# EAGLE board ENGI301-Project2 (EAGLE 9.6.2)
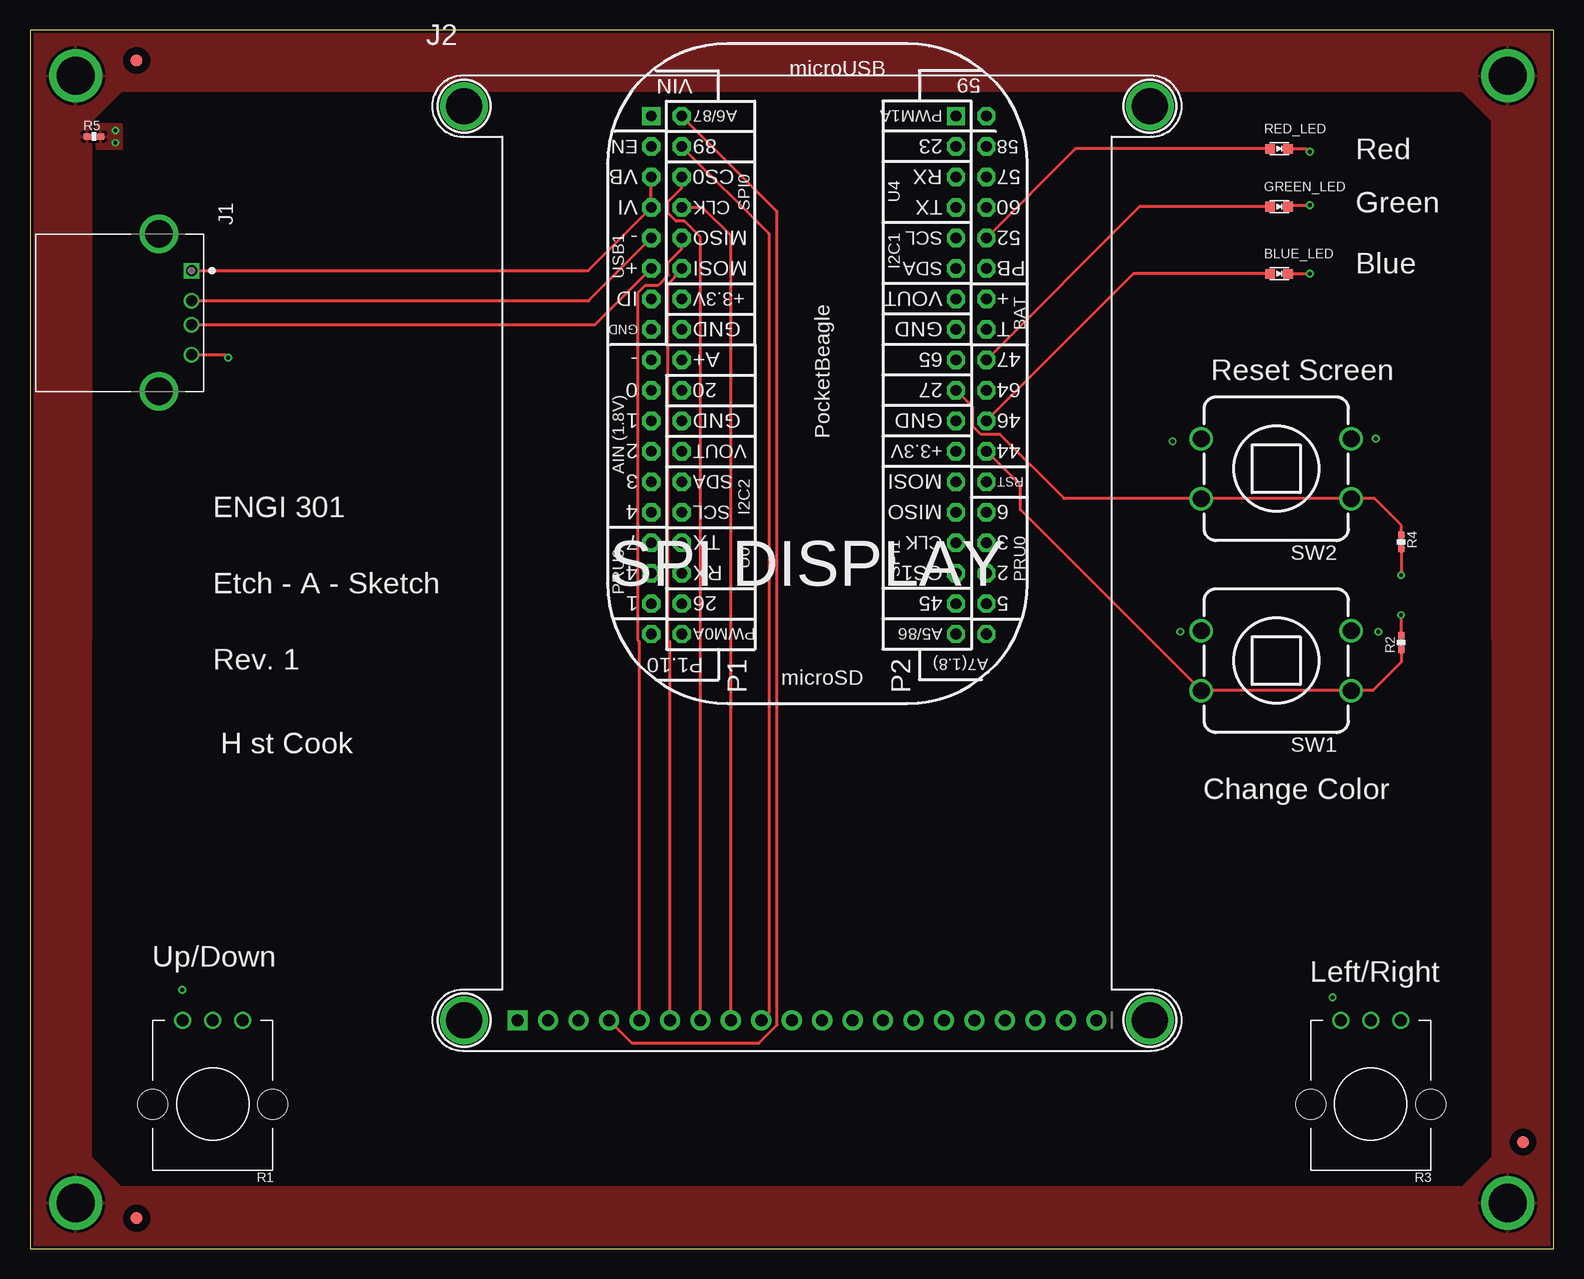
[diagram p0: board, top side]
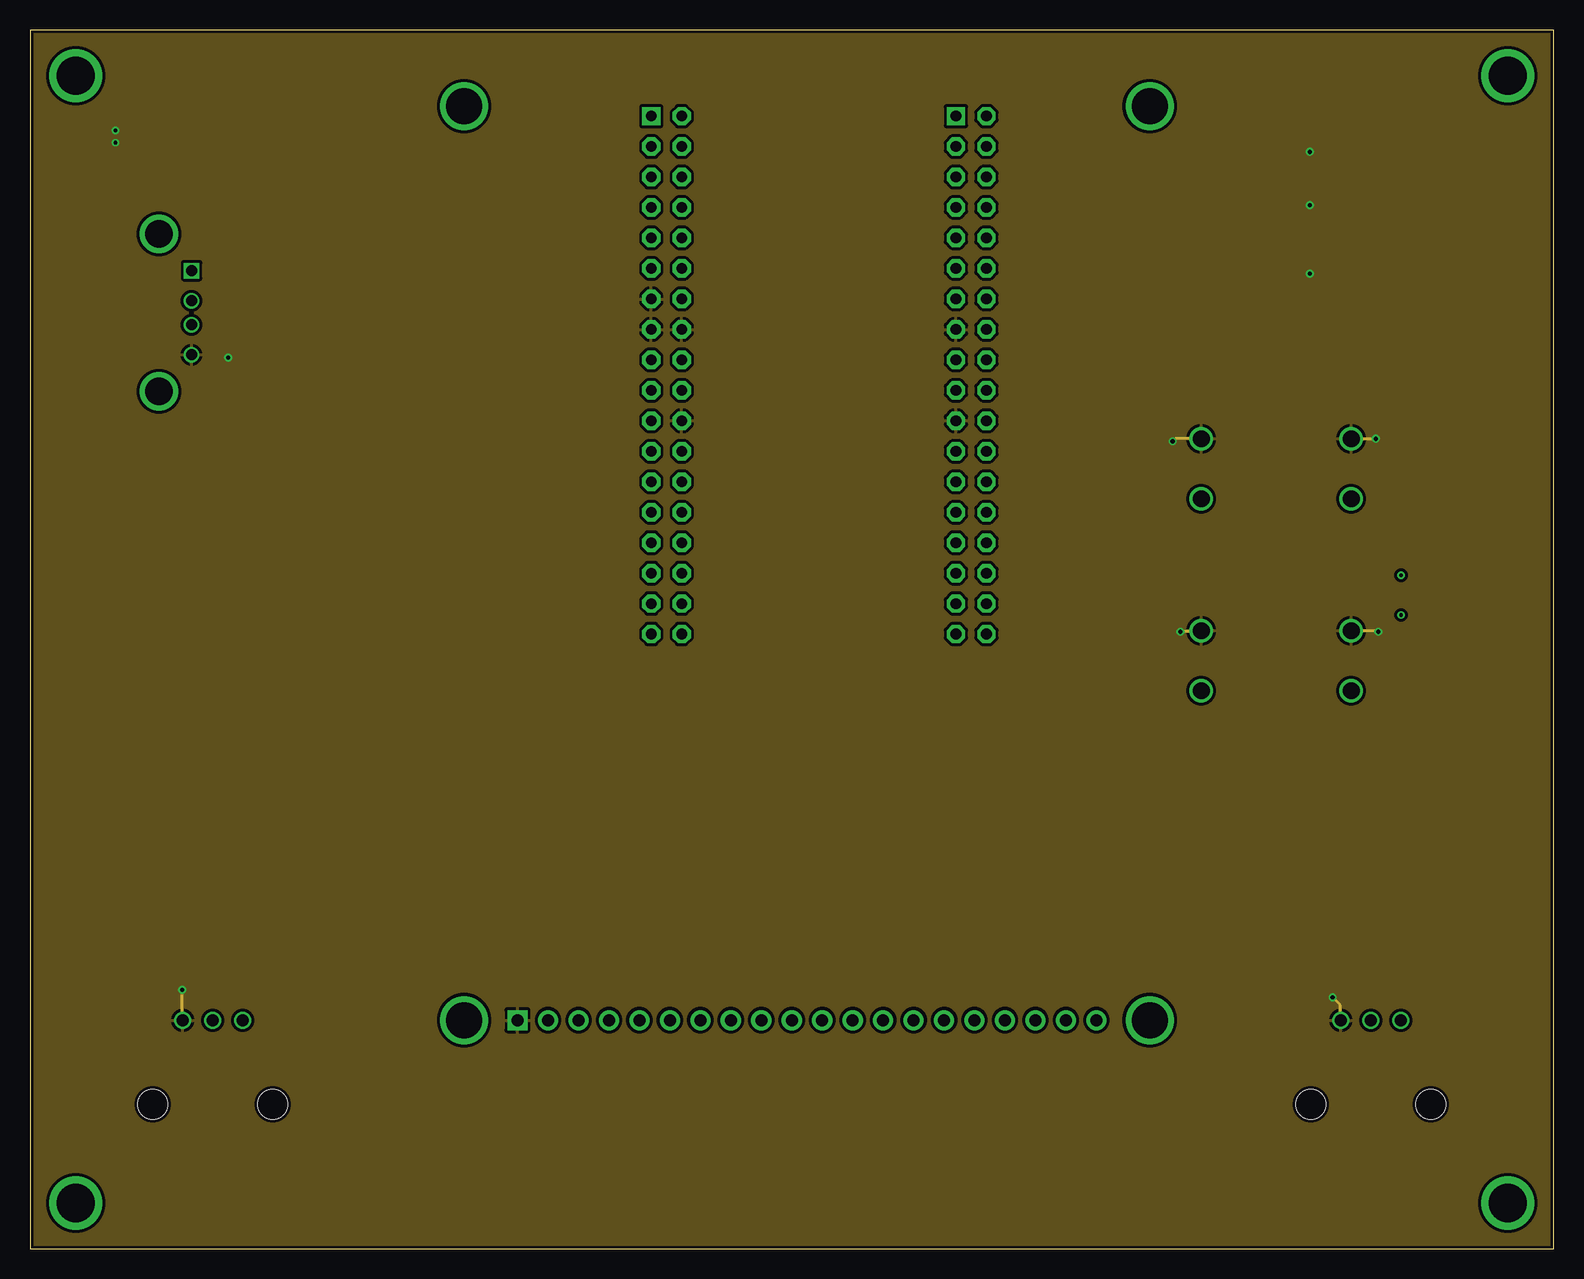
[diagram p1: board, inner layer Route2]
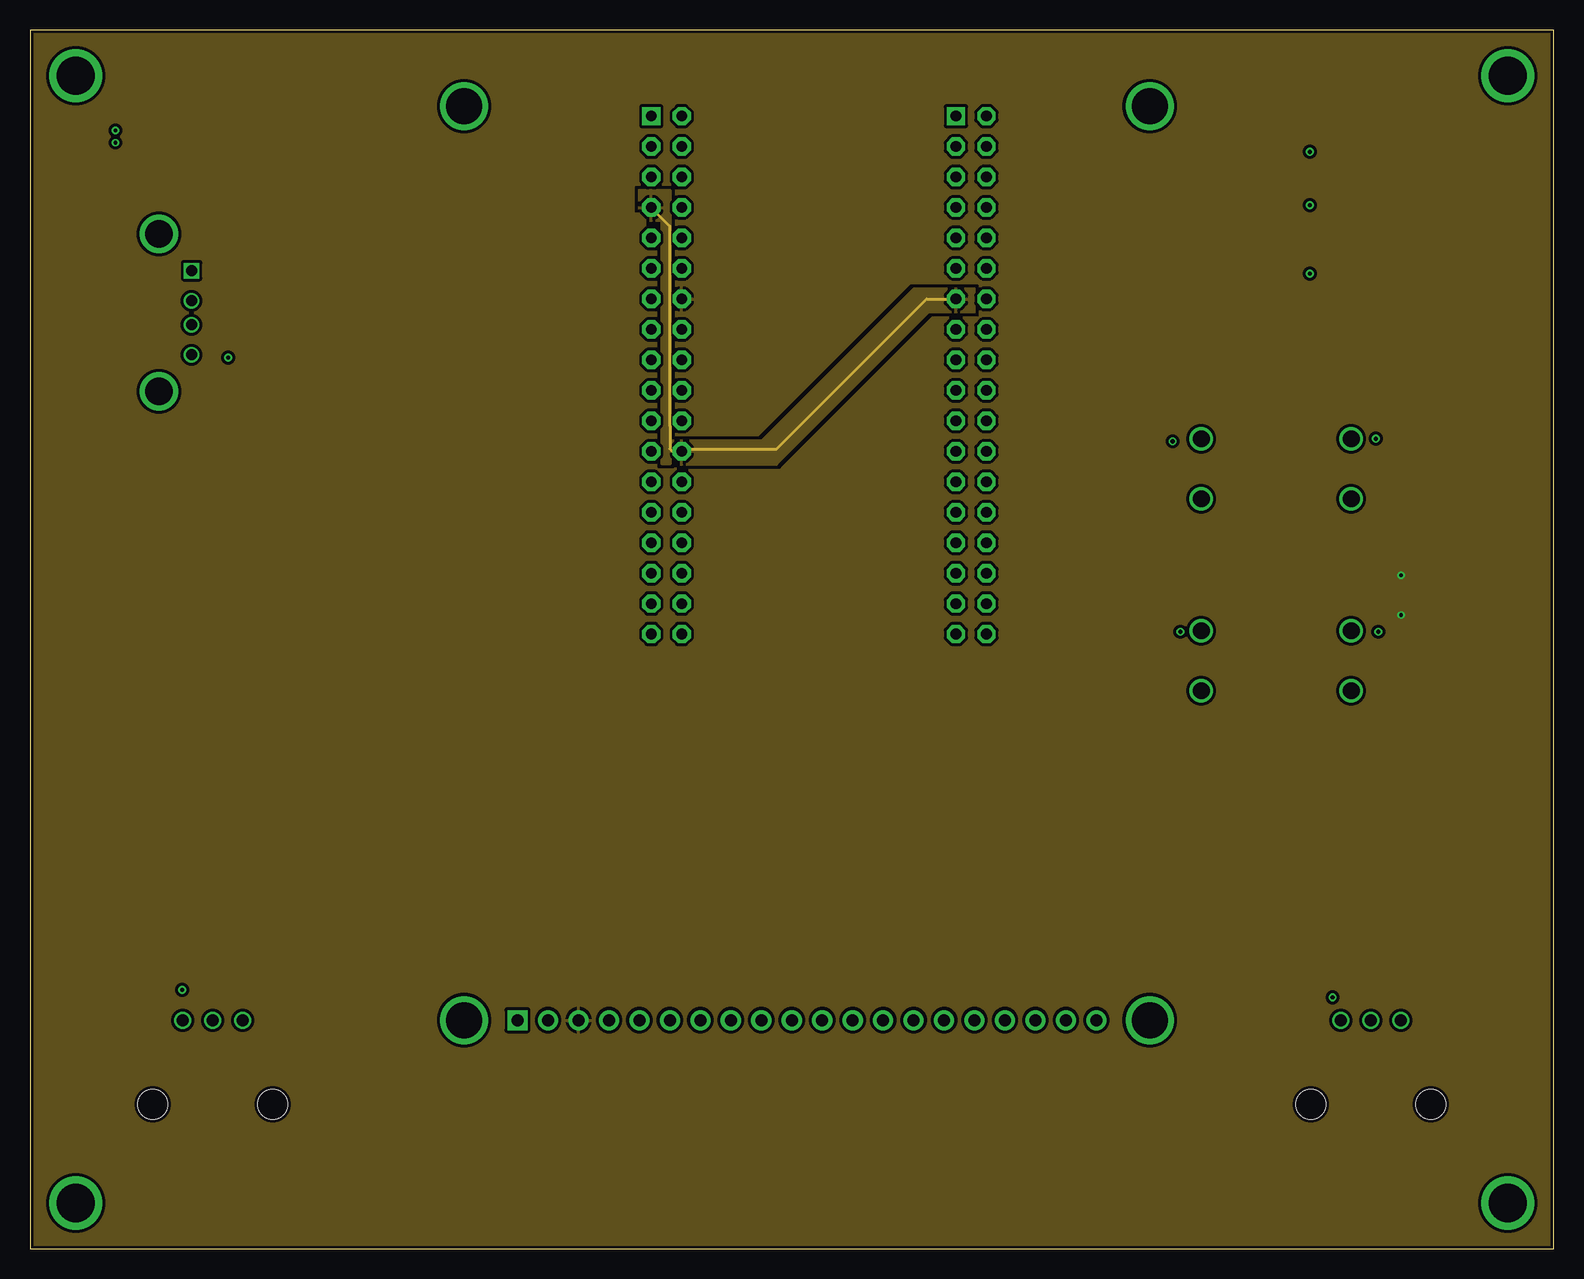
[diagram p2: board, inner layer Route15]
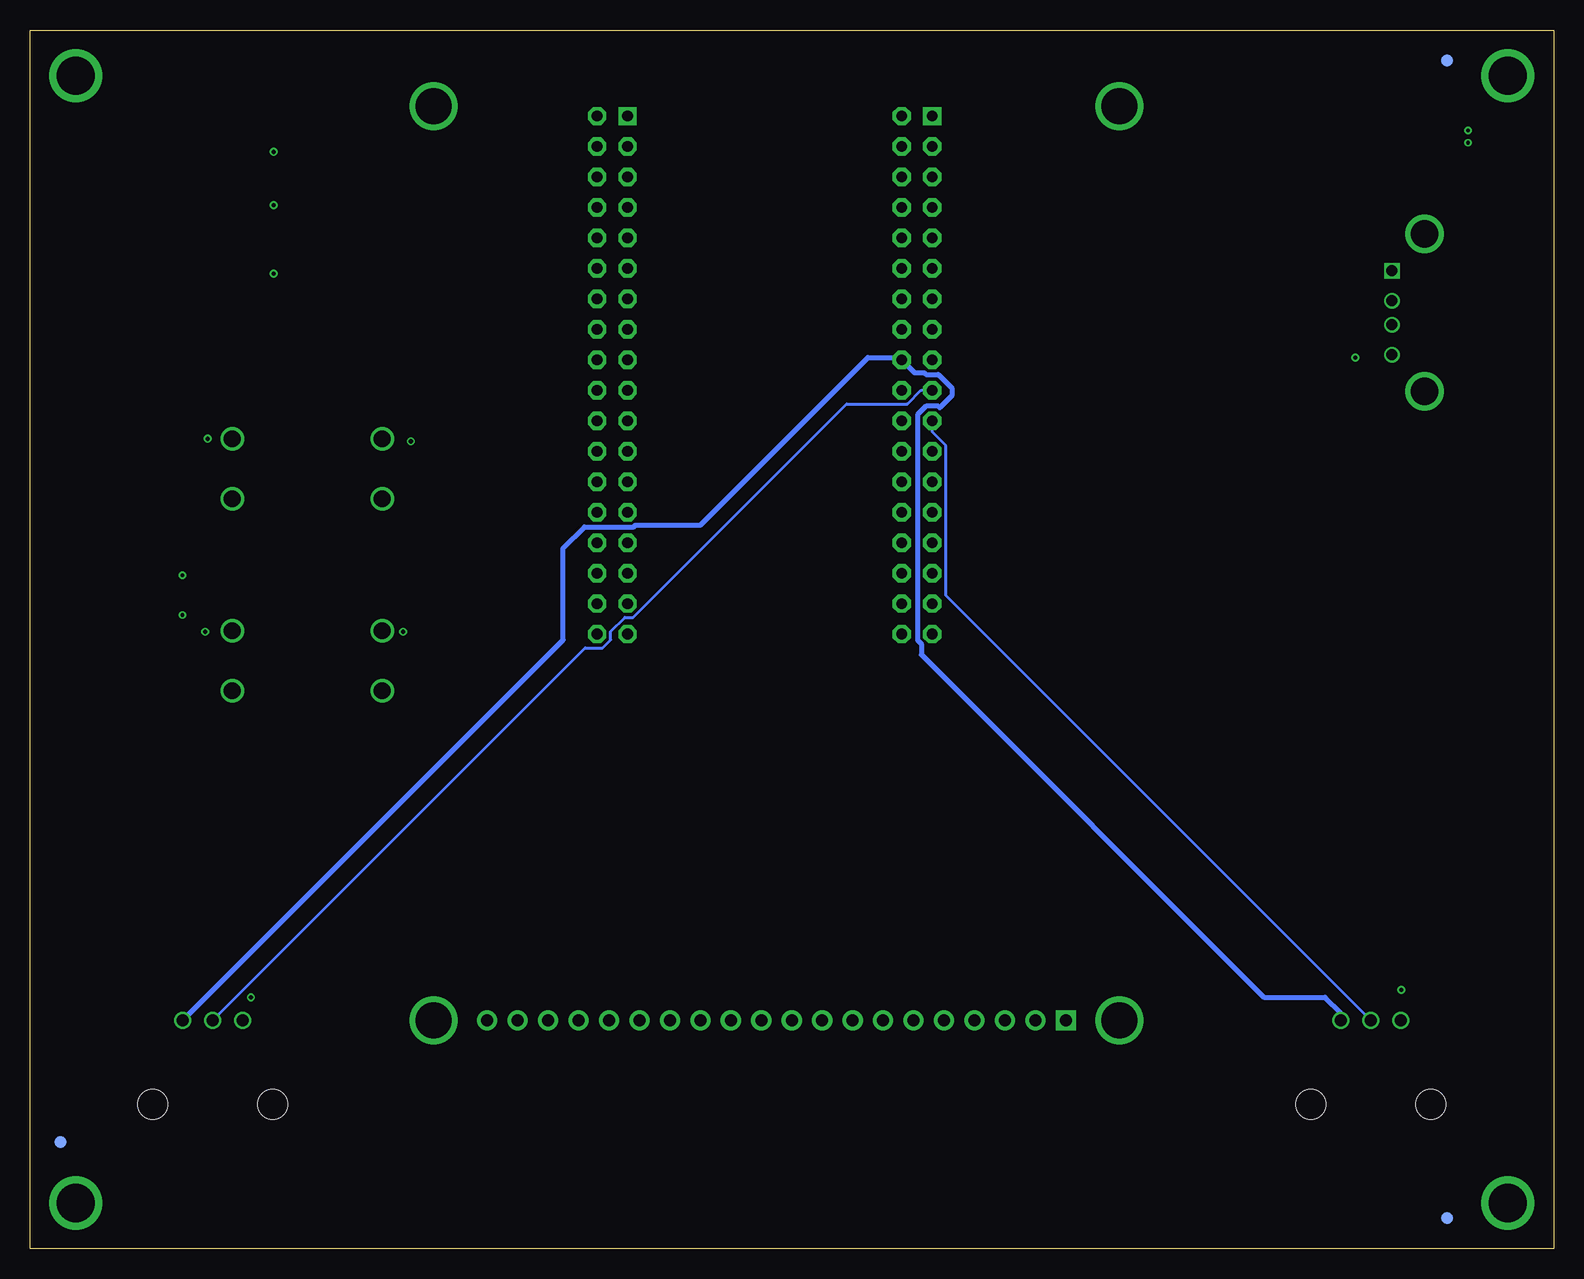
[diagram p3: board, bottom side, seen from below]

Size 127 x 101.6 mm. Coordinates in mm from the lower left corner, seen from the top.
Outline: 0,0 127,0 127,101.6 0,101.6 0,0
Copper layers (1*2*15*16): Top 0.035mm / dielectric 0.23mm / Route2 0.035mm / dielectric 0.93mm / Route15 0.035mm / dielectric 0.23mm / Bottom 0.035mm
Design rules "ENGI301_4lyr": minimum track width 10mil, minimum drill 12mil, track to track 10mil, track to pad 10mil, pad to pad 10mil, via to via 10mil, smd to smd 10mil, copper to edge 10mil, drill to drill 12mil, minimum pad ring 6mil, minimum via ring 6mil, stop-mask expansion 3mil, vias tented up to drill 25mil, thermal gap 10mil

## Footprints (pad centres in the part's own frame; a part is rotated, then mirrored left to right if it is on the bottom)
EIA-STD = smd 0.8 x 0.8: ANODE -0.75,0; CATHODE 0.75,0
FIDUCIAL_40MIL = smd 1.016 x 1.016: P$1 0,0
TE_292303-1 = drill 0.92 square: 1 0,0 | drill 0.92: 2 2.5,0; 3 4.5,0; 4 7,0 | drill 2.3: SH1 -3.07,-2.71; SH2 10.07,-2.71
SPI_LCD_DISPLAY = drill 1 pad 1.676 square: 1@JP2 -24.13,-38.1 | drill 1 pad 1.676: 2@JP2 -21.59,-38.1; 3@JP2 -19.05,-38.1; 4@JP2 -16.51,-38.1; 5@JP2 -13.97,-38.1; 6@JP2 -11.43,-38.1; 7@JP2 -8.89,-38.1; 8@JP2 -6.35,-38.1; 9@JP2 -3.81,-38.1; 10@JP2 -1.27,-38.1; 11@JP2 1.27,-38.1; 12@JP2 3.81,-38.1; 13@JP2 6.35,-38.1; 14@JP2 8.89,-38.1; 15@JP2 11.43,-38.1; 16@JP2 13.97,-38.1; 17@JP2 16.51,-38.1; 18@JP2 19.05,-38.1; 19@JP2 21.59,-38.1; 20@JP2 24.13,-38.1 | drill 3 pad 3.6: P$1@U$7 -28.575,-38.1; P$1@U$15 28.575,-38.1; P$1@U$16 -28.575,38.1; P$1@U$17 28.575,38.1
MOUNTING_HOLE = drill 3.175 pad 4.445: P$1 0,0
POT-PO90S = drill 1: CCW -2.5,0; CW 2.5,0; S 0,0 | hole 2.5: -5,7; 5,7
R0402 = smd 0.61 x 0.508: 1 -0.559,0; 2 0.559,0
BUTTON_12.5MM = drill 1.4: 1 -6.25,2.5; 2 -6.25,-2.5; 3 6.25,2.5; 4 6.25,-2.5
POCKETBEAGLE = drill 0.889 pad 1.524 square: P1_01 5.91,3.53; P2_01 5.91,28.93 | drill 0.889 pad 1.524 octagon: P1_02 5.91,6.07; P1_03 8.45,3.53; P1_04 8.45,6.07; P1_05 10.99,3.53; P1_06 10.99,6.07; P1_07 13.53,3.53; P1_08 13.53,6.07; P1_09 16.07,3.53; P1_10 16.07,6.07; P1_11 18.61,3.53; P1_12 18.61,6.07; P1_13 21.15,3.53; P1_14 21.15,6.07; P1_15 23.69,3.53; P1_16 23.69,6.07; P1_17 26.23,3.53; P1_18 26.23,6.07; P1_19 28.77,3.53; P1_20 28.77,6.07; P1_21 31.31,3.53; P1_22 31.31,6.07; P1_23 33.85,3.53; P1_24 33.85,6.07; P1_25 36.39,3.53; P1_26 36.39,6.07; P1_27 38.93,3.53; P1_28 38.93,6.07; P1_29 41.47,3.53; P1_30 41.47,6.07; P1_31 44.01,3.53; P1_32 44.01,6.07; P1_33 46.55,3.53; P1_34 46.55,6.07; P1_35 49.09,3.53; P1_36 49.09,6.07; P2_02 5.91,31.47; P2_03 8.45,28.93; P2_04 8.45,31.47; P2_05 10.99,28.93; P2_06 10.99,31.47; P2_07 13.53,28.93; P2_08 13.53,31.47; P2_09 16.07,28.93; P2_10 16.07,31.47; P2_11 18.61,28.93; P2_12 18.61,31.47; P2_13 21.15,28.93; P2_14 21.15,31.47; P2_15 23.69,28.93; P2_16 23.69,31.47; P2_17 26.23,28.93; P2_18 26.23,31.47; P2_19 28.77,28.93; P2_20 28.77,31.47; P2_21 31.31,28.93; P2_22 31.31,31.47; P2_23 33.85,28.93; P2_24 33.85,31.47; P2_25 36.39,28.93; P2_26 36.39,31.47; P2_27 38.93,28.93; P2_28 38.93,31.47; P2_29 41.47,28.93; P2_30 41.47,31.47; P2_31 44.01,28.93; P2_32 44.01,31.47; P2_33 46.55,28.93; P2_34 46.55,31.47; P2_35 49.09,28.93; P2_36 49.09,31.47

## Placement (x,y rotation side)
BLUE_LED  LED  [EIA-STD]  104.14,81.28 0 top
FUD1  FIDUCIAL  [FIDUCIAL_40MIL]  8.89,99.06 0 bottom
FUD2  FIDUCIAL  [FIDUCIAL_40MIL]  8.89,2.54 0 bottom
FUD3  FIDUCIAL  [FIDUCIAL_40MIL]  124.46,8.89 0 bottom
FUD4  FIDUCIAL  [FIDUCIAL_40MIL]  8.89,99.06 0 top
FUD5  FIDUCIAL  [FIDUCIAL_40MIL]  8.89,2.54 0 top
FUD6  FIDUCIAL  [FIDUCIAL_40MIL]  124.46,8.89 0 top
GREEN_LED  LED  [EIA-STD]  104.14,86.87 0 top
J1  292303-1  [TE_292303-1]  13.46,81.53 270 top
J2  SPI_LCD_DISPLAY  [SPI_LCD_DISPLAY]  64.77,57.15 0 top
MGT1  MOUNTING_HOLE  [MOUNTING_HOLE]  123.19,97.79 0 top
MGT2  MOUNTING_HOLE  [MOUNTING_HOLE]  3.81,97.79 0 top
MGT3  MOUNTING_HOLE  [MOUNTING_HOLE]  3.81,3.81 0 top
MGT4  MOUNTING_HOLE  [MOUNTING_HOLE]  123.19,3.81 0 top
R1  POTENTIOMETER  [POT-PO90S]  15.24,19.05 180 top
R2  1k  [R0402]  114.3,50.55 90 top
R3  POTENTIOMETER  [POT-PO90S]  111.76,19.05 180 top
R4  1k  [R0402]  114.3,58.93 270 top
R5  1k  [R0402]  5.33,92.71 0 top
RED_LED  LED  [EIA-STD]  104.14,91.69 0 top
SW1  PUSH_BUTTON  [BUTTON_12.5MM]  103.89,49.02 180 top
SW2  PUSH_BUTTON  [BUTTON_12.5MM]  103.89,65.02 180 top
U1  POCKETBEAGLE  [POCKETBEAGLE]  48.26,100.33 270 top

## Library data of the parts
BLUE_LED FUD1-FUD6 GREEN_LED J2 MGT1-MGT4 R1-R5 RED_LED SW1 SW2 U1 = ENGI301-Project2
J1 = ENGI301-Project2; AVAILABILITY: In Stock; COMMENT: 292303-1; DESCRIPTION: Conn; Data; USB; Recept; 2.0; 4 Pos; 1 Port; Rt Angle; A Ser; Tin over Copper; MF: TE Connectivity; MP: 292303-1; PACKAGE: None; PRICE: None; PURCHASE-URL: https://pricing.snapeda.com/search/part/292303-1/?ref=eda

## Nets
3.3V: U1.P2_23
AI0: R3.S U1.P1_19
AI1: R1.S U1.P1_21
BAT.VIN: U1.P2_14
BLUE_LED: BLUE_LED.ANODE U1.P2_22
BUTTON1: R4.1 SW2.1 SW2.3 U1.P2_19
BUTTON2: R2.1 SW1.1 SW1.3 U1.P2_24
CGND: MGT1.P$1 MGT2.P$1 MGT3.P$1 MGT4.P$1 R5.1
CLK: J2.8@JP2 U1.P1_08
CS: J2.7@JP2 U1.P1_06
D/C: J2.9@JP2 U1.P1_04
GND: BLUE_LED.CATHODE GREEN_LED.CATHODE J1.4 J2.1@JP2 R1.CW R3.CW R5.2 RED_LED.CATHODE SW1.2 SW1.4 SW2.2 SW2.4 U1.P1_13 U1.P1_15 U1.P1_16 U1.P1_22 U1.P2_15 U1.P2_21
GREEN_LED: GREEN_LED.ANODE U1.P2_18
MISO: J2.5@JP2 U1.P1_10
MOSI: J2.6@JP2 U1.P1_12
RED_LED: RED_LED.ANODE U1.P2_10
RST: J2.4@JP2 U1.P1_02
SPI: U1.P1_20
USB_D+: J1.3 U1.P1_11
USB_D-: J1.2 U1.P1_09
VDD_1P8V: R1.CCW R3.CCW U1.P1_18
VDD_3P3V: J2.3@JP2 R2.2 R4.2 U1.P1_14
VDD_5V: J1.1 U1.P1_05 U1.P1_07 U1.P1_24 U1.P2_13
VIN: U1.P1_01

## Tracks (layer width: path | path; a pad name or v marks a point on that pad's centre or on a via)
AI0
  Bottom 0.254: R3.S 80.71,50.1 79.26,50.1 78.59,50.77 78.59,51.46 77.41,52.64 76.72,52.64 58.94,70.42 53.86,70.42 52.71,71.56 U1.P1_19
AI1
  Bottom 0.254: R1.S 50.65,54.46 50.65,66.95 51.79,68.1 U1.P1_21
BLUE_LED
  Top 0.254: BLUE_LED.ANODE 91.99,81.28 U1.P2_22
BUTTON1
  Top 0.254: U1.P2_19 78.59,70.16 78.59,68.55 79.26,67.88 80.87,67.88 86.23,62.52 SW2.3 SW2.1 112.1,62.52 114.3,60.33 R4.1
BUTTON2
  Top 0.254: R2.1 114.3,48.9 111.93,46.52 SW1.1 SW1.3 82.55,61.61 82.55,63.66 U1.P2_24
CGND
  pour Top: -2.54,50.8 -2.54,-2.54 129.54,-2.54 129.54,50.8 121.92,50.8 121.92,7.62 119.38,5.08 7.62,5.08 5.08,7.62 5.08,50.8
  pour Top: -2.54,50.8 -2.54,104.14 129.54,104.14 129.54,50.8 121.92,50.8 121.92,93.98 119.38,96.52 7.62,96.52 5.08,93.98 5.08,50.8
CLK
  Top 0.254: J2.8@JP2 58.42,84.45 56.08,86.8 U1.P1_08
CS
  Top 0.254: J2.7@JP2 55.88,84.33 54.55,85.66 53.86,85.66 53.19,86.33 53.19,87.27 54.33,88.42 U1.P1_06
D/C
  Top 0.254: U1.P1_04 61.59,84.61 61.59,19.68 J2.9@JP2
GND  (via drill 0.3 pad 0.61, 0.35)
  Top 0.254: J1.4 16.27,74.53 v16.51,74.3 | RED_LED.CATHODE 106.43,91.69 v106.68,91.44 | GREEN_LED.CATHODE 105.02,87 v106.68,87 | BLUE_LED.CATHODE v106.68,81.28
  Route2 0.254: R1.CW 12.7,19.09 v12.7,21.59 | SW2.4 95.46,67.52 v95.25,67.31 | SW2.2 v112.18,67.52 | R3.CW 109.22,19.09 109.22,20.32 v108.58,20.95 | SW1.4 97.55,51.44 v95.89,51.44 | SW1.2 112.31,51.52 v112.39,51.44
  other vias: 7.11,93.22 7.11,92.2
  pour Route2: 0,106.68 132.08,106.68 132.08,-5.08 -5.08,-5.08 -5.08,106.68
  pour Top: 5.59,93.73 7.62,93.73 7.62,91.69 5.59,91.69
GREEN_LED
  Top 0.254: GREEN_LED.ANODE 92.5,86.87 U1.P2_18
MISO
  Top 0.254: J2.5@JP2 50.8,50.61 50.71,50.71 50.65,50.77 50.65,79.65 51.32,80.32 52.38,80.32 53.25,81.19 53.19,81.25 53.19,82.19 54.33,83.34 U1.P1_10
MOSI
  Top 0.254: J2.6@JP2 53.34,50.61 53.19,50.77 53.19,80.41 53.76,80.98 53.76,81.14 U1.P1_12
RED_LED
  Top 0.254: RED_LED.ANODE 87.16,91.69 U1.P2_10
RST
  Top 0.254: J2.4@JP2 50.16,17.14 60.78,17.14 62.28,18.65 62.28,86.47 U1.P1_02
USB_D+
  Top 0.254: J1.3 47.1,77.03 U1.P1_11
USB_D-
  Top 0.254: J1.2 46.56,79.03 U1.P1_09
VDD_1P8V
  Bottom 0.406: R3.CCW 82.55,50.76 82.55,58.42 80.79,60.18 76.69,60.18 76.54,60.33 71.12,60.33 57.15,74.3 54.52,74.3 U1.P1_18 53.26,73.03 52.44,73.03 52.3,72.88 51.29,72.88 50.16,71.75 50.16,71.12 51.16,70.12 51.28,70.24 52.3,70.24 53.01,69.53 53.01,50.73 52.7,50.43 52.7,49.53 24.13,20.95 19.05,20.95 17.74,19.64 R1.CCW
VDD_3P3V  (via drill 0.3 pad 0.61)
  Top 0.254: R4.2 v114.3,56.13 | R2.2 v114.3,52.83
  pour Route15 (rank 6): -7.62,109.22 134.62,109.22 134.62,-7.62 -7.62,-7.62
VDD_5V
  Top 0.254: U1.P1_05 U1.P1_07 46.52,81.53 J1.1
  Route15 0.254: U1.P2_13 74.73,79.18 62.23,66.67 54.52,66.67 U1.P1_24 53.53,66.48 53.34,66.67 53.34,68.59 53.33,68.6 53.33,85.26 U1.P1_07
  pour Route15: 60.96,67.31 53.34,67.31 53.34,65.41 62.23,65.41 74.93,78.11 78.74,78.11 78.74,80.01 73.66,80.01
  pour Route15: 53.34,65.41 52.7,65.41 52.7,85.72 50.8,85.72 50.8,88.27 53.34,88.27 53.34,67.31

## Text on the board
tPlace: Red | Green | Blue | Reset Screen | ENGI 301 | Etch - A - Sketch | Rev. 1 | H st Cook | Change Color | Up/Down | Left/Right